# Altium PCB Copy of electronic.PcbDoc
Units mil, origin at the board's own origin, x right, y up, seen from the top; angles counter-clockwise.
Board outline 5082.84 x 2360.45 mil, 2 copper layers (Top Layer, Bottom Layer); 55 components, 37 nets, 160 pads, 42 vias.
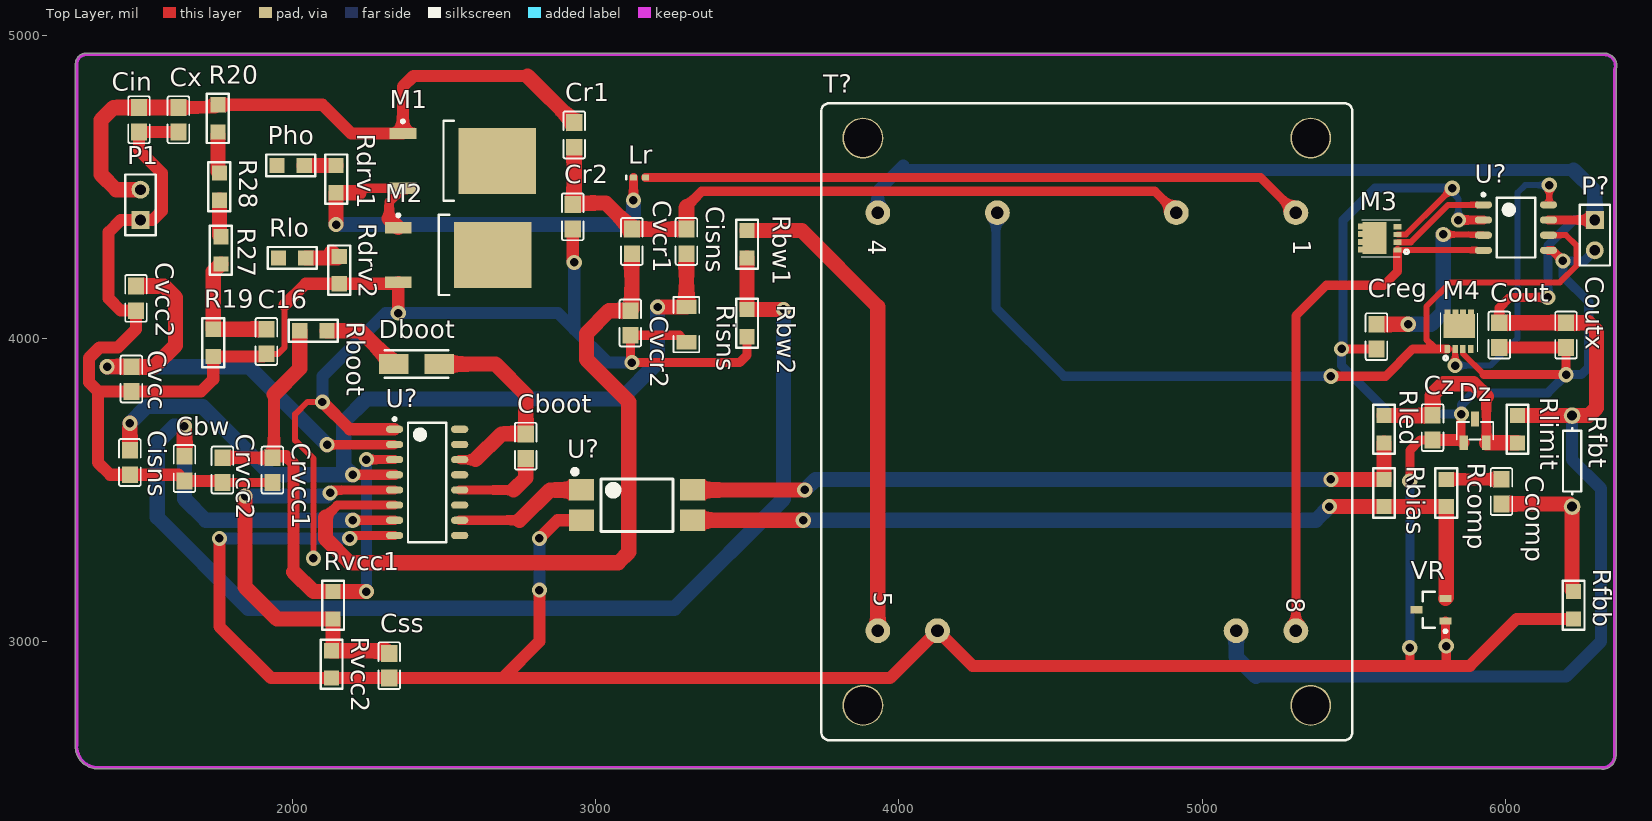
[diagram p0: Top Layer view]
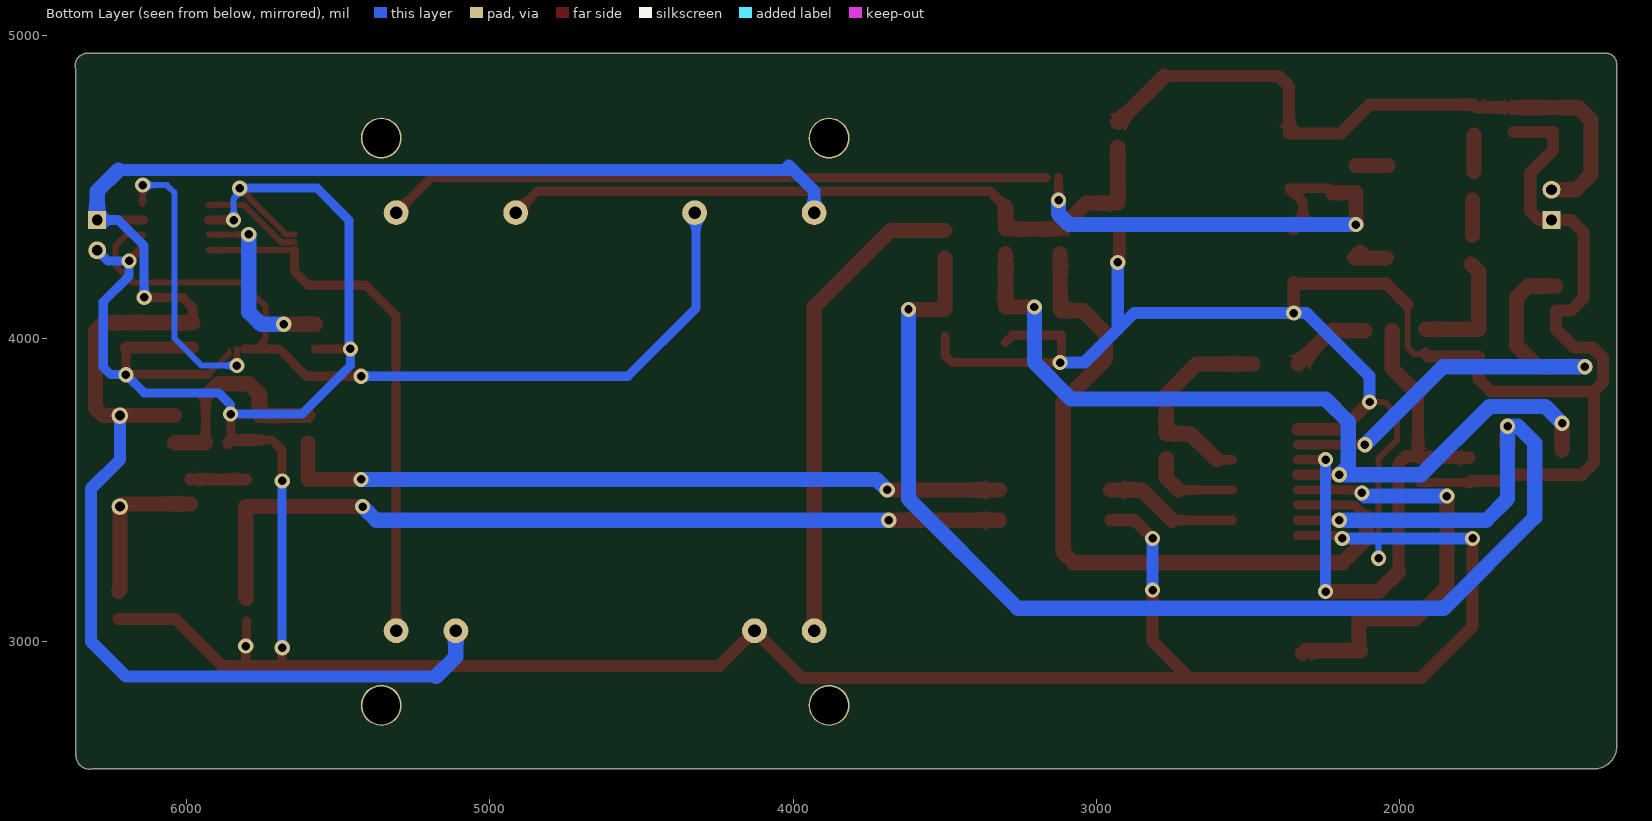
[diagram p1: Bottom Layer view, seen from below]

## Layer stack, top to bottom
Top Solder: solder mask 0.4, Solder Resist, Dk 3.5
Top Layer: signal copper 1.4
Dielectric 1: dielectric 12.6, FR-4, Dk 4.8
Bottom Layer: signal copper 1.4
Bottom Solder: solder mask 0.4, Solder Resist, Dk 3.5

## Board outline
1284.64,2654.08 cw(c1289.66,2654.16) 1284.98,2655.98 1284.98,4905 cw(c1290,4905) 1285.39,4906.97 cw(c1320.74,4904.6) 1319.88,4940.01 cw(c1320,4935) 1320,4940.02 6324.9,4940.02 cw(c6326.46,4899.02) 6328.02,4940.02 6330,4940.02 cw(c6330,4935) 6331.74,4939.7 cw(c6326.46,4899.02) 6367.49,4899.02 cw(c6326.46,4899.02) 6365.02,4884.99 6365.02,2623.66 cw(c6360,2623.66) 6364.53,2621.51 cw(c6320.52,2623.66) 6314.65,2579.99 1362.58,2579.99 cw(c1362.58,2585) 1360.81,2580.31 cw(c1359.56,2655.22)

## Design rules (kind name [scope] priority, off if disabled: settings)
Clearance [All] p1: gap=0 ignorepadtopadclearanceinfootprint=FALSE
HoleSize [All] p1: absolutevalues=TRUE maxlimit=150 minlimit=1 maxpercent=80.000 minpercent=20.000
MinimumSolderMaskSliver [All] p1: minsoldermaskwidth=0
PolygonConnect [All] p1: connectstyle=Relief reliefconductorwidth=10 reliefentries=4 polygonreliefangle="90 Angle" airgapwidth=10
RoutingVias [All] p1: holewidth=28 width=50 viastyle="Through Hole" minholewidth=28 minwidth=50 maxholewidth=28 maxwidth=50
SilkToSilkClearance [All] p1: silktosilkclearance=0
SilkToSolderMaskClearance [IsPad] p1: minsilkscreentomaskgap=0 clearancetoexposedcopper=TRUE
SolderMaskExpansion [All] p1: expansion=4
Width [InNetClass('All Nets')] p1: maxlimit=50 minlimit=10 preferedwidth=20
26 further rules are at their usual default settings.

## Classes and differential pairs
component class electronic: C16 Cboot Cbw Ccomp Cin Cisns Cout Coutx Cr1 Cr2 Creg Crvcc1 Crvcc2 Css Cvcc Cvcc2 Cvcr1 Cvcr2 Cx Cz Dboot Dz Lr M1 M2 M3 M4 P1 P? Pho R19 R20 R27 R28 Rbias Rboot Rbw1 Rcomp Rdrv1 Rdrv2 Rfbb Rfbt Risns Rled Rlimit Rlo Rvcc1 Rvcc2 T? U? VR

## Components (designator, comment, footprint, x,y, rotation, side; value= is the part's Value field where it differs from the comment)
C16 "Cap" C0805 19875,8499.45 r90 top value=220pF
Cboot "Cap" C0805 20730,8154.45 r90 top value=82nF
Cbw "Cap" C0805 19605,8080.55 r90 top value=3.9pF
Ccomp "Cap" C0805 -11972.72,-1015.31 r270 top value=200nF
Cin "Cap" C0805 19455,9230.55 r90 top value=47uF
Cisns "Cap" C0805 21260,8829.45 r90 top value=100pF
Cisns "Cap" C0805 19425,8100.55 r90 top value=3.3pF
Cout "Cap" C0805 -11980,-499.45 r270 top value=120uF
Coutx "Cap" C0805 -11760,-499.45 r270 top value=88uF
Cr1 "Cap" C0805 20890,9180.55 r90 top value=9.128nF
Cr2 "Cap" C0805 20885,8910.55 r90 top value=9.128nF
Creg "Cap" C0805 23535,8515.55 r90 top value=2.2uF
Crvcc1 "Cap" C0805 19895,8075.55 r90 top value=4.7uF
Crvcc2 "Cap" C0805 19730,8075.55 r90 top value=4.7uF
Css "Cap" C0805 -15640,-1589.45 r270 top value=47nF
Cvcc "Cap" C0805 19430,8375.55 r90 top value=2.2uF
Cvcc2 "Cap" C0805 19445,8641.65 r90 top value=15uF
Cvcr1 "Cap" C0805 21080,8829.45 r90 top value=123.494pF
Cvcr2 "Cap" C0805 21075,8560.55 r90 top value=820pF
Cx "Cap" C0805 19585,9230.55 r90 top value=1.5uF
Cz "Cap" C0805 23720,8215.55 r90 top value=100nF
Dboot "1.1V" "ST1300A - duplicate" 2410,3915 r0 top
Dz "D Zener" BZX84C11LT1G 5905,3690 r270 top
Lr "Inductor" 0402-A 3145,4530 r0 top value=138.753uH
M1 "MOSFET-N" FQDN30TM 2561.85,4584.84 r0 top
M2 "MOSFET-N" FQDN30TM 2546.85,4274.84 r0 top
M3 "100v" CSD19538Q3A 5575,4330 r90 top
M4 "100V" CSD19538Q3A 5847.69,4033.99 r0 top
P1 "Header 2" HDR1X2 1500,4390 r90 top
P? "Header 2" HDR1X2 6295,4390 r270 top
Pho "Res1" "R 0805_M" 2025,4575 r0 top value=1
R19 "Res1" "R 0805_M" 1735,4015 r90 top value=226k
R20 "Res1" "R 0805_M" 1750,4755 r90 top value=4.99M
R27 "4.99M" "R 0805_M" 1760,4320 r90 top value=1K
R28 "4.99M" "R 0805_M" 1755,4530 r90 top value=1K
Rbias "Res3" "R 0805_M" 5595,3520 r90 top value=6.04k
Rboot "Res1" "R 0805_M" 2100,4030 r0 top value=1K
Rbw1 "Res1" "R 0805_M" 3495,4340 r90 top value=35.7k
Rbw2 "Res1" "R 0805_M" 3495,4080 r90 top value=10k
Rcomp "Res1" "R 0805_M" 5800,3520 r90 top value=68.1k
Rdrv1 "Res1" "R 0805_M" 2140,4555 r90 top value=5.1k
Rdrv2 "Res1" "R 0805_M" 2150,4255 r90 top value=5.11k
Rfbb "Res1" "R 0805_M" 6220,3150 r90 top value=8.06k
Rfbt "Res1" AXIAL-0.3 6220,3595 r90 top value=86.6k
Risns "Res1" "R 1206" 3295,4050 r90 top value=1K
Rled "Res3" "R 0805_M" 5595,3730 r90 top value=36.5k
Rlimit "Res1" "R 0805_M" 6035,3730 r90 top value=10k
Rlo "Res1" "R 0805_M" 2030,4270 r0 top value=1
Rvcc1 "Res1" "R 0805_M" 2130,3150 r90 top value=150k
Rvcc2 "Res1" "R 0805_M" 2125,2955 r90 top value=49.9k
T? "Trans4 Ideal" TRF_8 4620,3725 r270 top
U? "UCC256303DDB" UCC256303 2445,3525 r0 top
U? "PS2501L-1-F3-A" PS2501-S 3141.93,3450 r0 top
U? "UCC24624" UCC24624 6035,4365 r0 top
VR "D Zener" TLV431x 5755,3105 r180 top

## Footprints (in the part's own frame and the unit in brackets; to place one, negate y for a bottom-side part, rotate by r counter-clockwise, add the part's x,y. Pads: shape width x height; smd on the part's side, far side on the other; paste and mask are expansions set on the pad)
0402-A [mm] "Chip Inductor, Body 1.0x0.5mm, IPC High Density"
  rect 0.6x0.5 smd: 1(-0.5,0) 2(0.5,0)
  silkscreen extent -1.1,-0.15 -1.1,0.15, body extent -0.55,-0.3 0.55,0.3, height 0.55
AXIAL-0.3 [mm] "Axial Device, Thru-Hole; 2 Leads; 0.3 in Pin Spacing"
  round 1.4 hole 0.85: 1(-3.81,0) 2(3.81,0)
  silkscreen extent -2.77,-0.76 2.77,0.76
BZX84C11LT1G [mm]
  rect 1.25x0.7 smd: 1(0.873,-1.077) 2(0.873,0.823) 3(-1.127,-0.127)
  silkscreen extent -0.85,-1.65 0.6,1.4
C0805 [mm]
  rect 1.41x1.35 smd: 1(-115.584,456.184) 2(-113.524,456.184)
  silkscreen extent -116.52,455.28 -112.59,457.09
CSD19538Q3A [mm]
  rect 0.45x0.68 smd: 1(-0.988,-1.752) 2(-0.337,-1.752) 3(0.313,-1.752) 4(0.963,-1.752)
  rect 0.5x0.6 smd: 5(0.988,1.245) 6(0.338,1.245) 7(-0.312,1.245) 8(-0.962,1.245)
  rect 2.65x2 smd: 9(0.013,0.153)
  silkscreen extent -1.55,-2.68 1.55,1.27
FQDN30TM [mm] "D-PAK, 3-Pads, Body 6.21x6.73mm (max), IPC Medium Density"
  rect 2.25x0.95 smd: 1(-5,2.29) 3(-5,-2.29)
  rect 6.5x5.55 smd: 4(2.9,0)
  silkscreen extent -5.12,-3.35 -0.75,3.44, body extent -1.6,-3.37 4.62,3.37, height 2.39
HDR1X2 [mm] "Connector; Header; 2 Position"
  rect 1.5x1.5 hole 0.9: 1(0,0)
  round 1.5 hole 0.9: 2(2.54,0)
  silkscreen extent -1.27,-1.27 3.81,1.27
PS2501-S [mm]
  rect 2.1x1.8 smd: 1(-4.777,1.27) 2(-4.777,-1.27) 3(4.523,-1.27) 4(4.523,1.27)
  silkscreen extent -5.53,-2.2 2.87,3
"R 0805_M" [mil]
  rect 50x50 smd: 1(-75,-5) 2(15,-5)
  silkscreen extent -111,-41 51,31, body extent -69,-30 9,20, height 20
"R 1206" [mil]
  rect 47.54x66.97 smd: 1(-63.22,-5) 2(53.22,-5)
  silkscreen extent -96,-47 86,37
"ST1300A - duplicate" [mm] "Molded Capacitor, 2-Leads, Body 5.00x2.15mm, IPC Medium Density"
  rect 2.45x1.65 smd: 1(-1.9,0) 2(1.9,0)
  silkscreen extent -2.65,-1.15 2.65,1.15, body extent -2.62,-1.15 2.63,1.15, height 2.3
TLV431x [mm] "SOT23, 3-Leads, Body 2.92x2.37mm, Pitch 0.95mm, IPC Medium Density"
  rect 1x0.6 smd: 1(-1.2,0.95) 2(-1.2,-0.95) 3(1.2,0)
  silkscreen extent -1.33,-1.5 0.7,1.92, body extent -0.7,-1.52 0.7,1.52, height 1.12
TRF_8 [mil] "Transformer; 8 Leads"
  round 82 hole 42: 1(-689.17,689.17) 2(-689.17,295) 3(-689.17,-295) 4(-689.17,-689.17) 5(689.17,-689.17) 6(689.17,-492.5) 7(689.17,492.5) 8(689.17,689.17)
  round 135 hole 125: MH1(-935,738.33) MH2(-935,-738.33) MH3(935,-738.33) MH4(935,738.33)
  silkscreen extent -1050,-875 1050,875
UCC24624 [mm] "SOIC, 8-Leads, Body 4.90x3.90mm, Pitch 1.27mm, IPC Medium Density"
  oval 1.45x0.6 smd: 1(-2.725,1.905) 2(-2.725,0.635) 3(-2.725,-0.635) 4(-2.725,-1.905) 5(2.725,-1.905) 6(2.725,-0.635) 7(2.725,0.635) 8(2.725,1.905)
  silkscreen extent -2.85,-2.5 1.6,2.88, body extent -2,-2.5 2,2.5, height 1.75
UCC256303 [mm] "SOIC, 16-Leads, Body 9.90x3.90mm, Pitch 1.27mm, IPC Medium Density"
  oval 1.45x0.6 smd: 1(-2.725,4.445) 2(-2.725,3.175) 3(-2.725,1.905) 4(-2.725,0.635) 5(-2.725,-0.635) 6(-2.725,-1.905) 7(-2.725,-3.175) 8(-2.725,-4.445) 9(2.725,-4.445) 10(2.725,-3.175) 11(2.725,-1.905) 12(2.725,-0.635) 13(2.725,0.635) 14(2.725,1.905) 15(2.725,3.175) 16(2.725,4.445)
  silkscreen extent -2.85,-5 1.6,5.42, body extent -2,-5 2,5, height 1.75

## Part data
C16 Cboot Cbw Ccomp Cin Cisns Cisns Cout Coutx Cr1 Cr2 Creg Crvcc1 Crvcc2 Css Cvcc Cvcc2 Cvcr1 Cvcr2 Cx Cz: "Capacitor", LatestRevisionDate=17-Jul-2002, LatestRevisionNote="Re-released for DXP Platform.", PackageDescription="Radial Cap, Thru-Hole; 2 Leads; 0.3 in Pin Spacing", PackageReference=RAD-0.3, Published=8-Jun-2000, Publisher="Altium Limited"
Dboot: library part "D Zener", "Zener Diode", LatestRevisionDate=17-Jul-2002, LatestRevisionNote="Re-released for DXP Platform.", PackageDescription="Diode, Thru-Hole; 2 Leads; 0.7 in Pin Spacing", PackageReference=DIODE-0.7, Published=8-Jun-2000, Publisher="Altium Limited"
Dz VR: "Zener Diode", LatestRevisionDate=17-Jul-2002, LatestRevisionNote="Re-released for DXP Platform.", PackageDescription="Diode, Thru-Hole; 2 Leads; 0.7 in Pin Spacing", PackageReference=DIODE-0.7, Published=8-Jun-2000, Publisher="Altium Limited"
M1 M2: "N-Channel MOSFET", LatestRevisionDate=17-Jul-2002, LatestRevisionNote="Re-released for DXP Platform.", PackageDescription="TO, Flat Index; 3 In-Line, Axial Leads; Body Dia. 4.6mm; Lead Dia. 0.5 mm (max)", PackageReference=E3, PackageVersion=1995/1996, Published=8-Jun-2000, Publisher="Altium Limited"
M3 M4: library part MOSFET-N, "N-Channel MOSFET", LatestRevisionDate=17-Jul-2002, LatestRevisionNote="Re-released for DXP Platform.", PackageDescription="TO, Flat Index; 3 In-Line, Axial Leads; Body Dia. 4.6mm; Lead Dia. 0.5 mm (max)", PackageReference=E3, PackageVersion=1995/1996, Published=8-Jun-2000, Publisher="Altium Limited"
P1 P?: "Header, 2-Pin", LatestRevisionDate=17-Jul-2002, LatestRevisionNote="Re-released for DXP Platform.", Publisher="Altium Limited"
Pho R19 R20 Rbias Rboot Rbw1 Rbw2 Rcomp Rdrv1 Rdrv2 Rfbb Rfbt Risns Rled Rlimit Rlo Rvcc1 Rvcc2: "Resistor", Published=8-Jun-2000, Publisher="Altium Limited"
  Pho R19 R20 Rboot Rbw1 Rbw2 Rcomp Rdrv1 Rdrv2 Rfbb Rfbt Risns Rlimit Rlo Rvcc1 Rvcc2: LatestRevisionDate=17-Jul-2002, LatestRevisionNote="Re-released for DXP Platform.", PackageDescription="Axial Device, Thru-Hole; 2 Leads; 0.3 in Pin Spacing", PackageReference=AXIAL-0.3
  Rbias Rled: LatestRevisionDate=29-May-2009, LatestRevisionNote="IPC-7351 Footprint Added.", PackageDescription="Chip Resistor", PackageReference=J1-0603
R27 R28: library part Res1, "Resistor", LatestRevisionDate=17-Jul-2002, LatestRevisionNote="Re-released for DXP Platform.", PackageDescription="Axial Device, Thru-Hole; 2 Leads; 0.3 in Pin Spacing", PackageReference=AXIAL-0.3, Published=8-Jun-2000, Publisher="Altium Limited"
T?: "Four-winding Transformer (Ideal)", LatestRevisionDate=17-Jul-2002, LatestRevisionNote="Re-released for DXP Platform.", PackageDescription="Transformer; 8 Leads", PackageReference=TRF_8, Published=25-Jan-2001, Publisher="Altium Limited"
U?: BOM_JLCPCB Part Class="Extended Part", BOM_Manufacturer=RENESAS, BOM_Manufacturer Part=PS2501L-1-F3-A, BOM_Supplier=LCSC, BOM_Supplier Part=C51825, spicePre=U, spiceSymbolName=PS2501L-1-F3-A
Lr: Code_IEC=1005, Code_JEITA=0402, LatestRevisionDate=29-May-2009, LatestRevisionNote="IPC-7351 Footprint Added.", PackageDescription="Chip Inductor", PackageReference=0402-A, Published=8-Jun-2000, Publisher="Altium Limited"

## Via types
v1: diameter 50, hole 28, Top Layer to Bottom Layer, 42 vias

## Nets (pads, with @x,y where several pads share a name; then routed paths per layer and width w, separated by ;. In a path a pad name is that pad's centre, name@x,y a point inside that pad or via, vN(x,y) a via of type N, cw(c..) or ccw(c..) an arc to the next point about the centre after c; other vN are vias at no path point)
_BLK_1: C16.2 R19.2 R27.1 | length 400.4
  Top Layer w50: R27.1 1740,4220 R19.2 C16.2
_BLK_2: U?.9
_HO_1: Pho.1
_HO_2: U?.13
_HS_1: Lr.1 M1.3 M2.1 Rdrv1.1 | length 1586
  Top Layer w30: 2234.68,4494.69 M1.3 2319.84,4449.53 2319.84,4395.16 ; v1(3125.32,4455) Lr.1
  Top Layer w50: v1(2145,4375) Rdrv1.1 2220,4480 ; 2319.84,4395.16 M2.1
  Bottom Layer w50: v1(2145,4375) 3090.32,4375 3125.32,4410 v1(3125.32,4455)
_HS_2: Cboot.1 U?.12 | length 298.2
  Top Layer w30: U?.12 2730,3500
  Top Layer w50: 2730,3500 2770,3540 Cboot.1
_LO_1: Rlo.1
_LO_2: U?.11
GND: C16.1 Cbw.1 Cin.1 Cisns.1@1465,3550 Cout.2 Coutx.2 Cr2.1 Creg.1 Crvcc1.1 Crvcc2.1 Css.2 Cvcc2.1 Cvcc.1 Cvcr2.1 Cx.1 Cz.1 Dz.1 M2.3 M3.3 M4.3 P1.1 P?.2 R19.1 Rbw2.1 Rdrv2.1 Rfbb.1 Risns.1 Rvcc2.1 T?.6 U?.1@2337.72,3700 U?.2@2953.86,3400 U?.2@5927.72,4390 U?.5@6142.28,4290 U?.8@2337.72,3350 VR.1 | length 17876.3
  Top Layer w10: v1@2925,4255 v1(2930,4250) ; v1@3115,3925 v1(3120,3920) ; v1@5802.24,2987.76 v1(5805,2985) ; 5860,3950 M4.3
  Top Layer w20: C16.1 1953.9,3948.9 1975,3970 1975,4110 ; v1(2070,3275) 2070,3603.9 2010,3663.9 2010,3750 2050,3790 v1(2100,3790) ; M3.3 5672.31,4342.31 5790,4460 v1(5825,4495) ; 5860,3950 5930,3880
  Top Layer w30: Crvcc2.1 Crvcc1.1 ; v1(2190,3340) 2200,3350 U?.8@2337.72,3350 ; v1@3115,3925 Cvcr2.1 3276.78,4010 Risns.1 ; v1(3120,3920) 3475,3920 3500,3945 Rbw2.1 ; v1(5460,3965) Creg.1 ; 5685,2925 v1(5685,2980) ; v1(5685,3530) 5685,3630 5720,3665 Cz.1 ; v1@5802.24,2987.76 VR.1 ; 5805,2925 v1(5805,2985) ; v1(5845,4390) U?.2@5927.72,4390 ; Dz.1@5853.23,3665 v1@5853.23,3748.23 ; 5930,3880 v1(6200,3880) Coutx.2 ; U?.5@6142.28,4290 6155,4290 v1(6190,4255)
  Top Layer w40: Cx.1 Cin.1 1495,4620 1570,4545 1570,4420 1540,4390 P1.1 1435,4390 1395,4350 1395,4131.1 1435,4091.1 Cvcc2.1 1485,4030 1425,3970 1365,3970 1330,3935 1330,3855 1360,3825 ; v1(1760,3340) 1760,3050 1930,2880 Rvcc2.1 Css.2 2695,2880 2815,3000 v1(2815,3170) ; Crvcc2.1 1765,3530 Cbw.1 1625,3550 1465,3550 1400,3550 1360,3590 1360,3825 ; C16.1 1906.1,3940 R19.1 1740,3865 1700,3825 Cvcc.1 1360,3825 ; 1975,4110 2045,4180 Rdrv2.1 2345.32,4180 M2.3 v1(2350,4082.99) ; v1(2100,3790) 2190,3700 U?.1@2337.72,3700 ; 2675,2880 3971.67,2880 T?.6 4243.33,2920 5882.72,2920 6037.72,3075 Rfbb.1 ; v1(2815,3340) 2875,3400 U?.2@2953.86,3400 ; v1@2925,4255 Cr2.1 ; Cz.1 5853.23,3665 Dz.1 ; Cout.2 Coutx.2
  Bottom Layer w10: v1(5460,3965) v1@5465,3970
  Bottom Layer w20: v1(2070,3275) 2070,3340 ; v1(5825,4495) 5825,4480 5845,4460 v1(5845,4390)
  Bottom Layer w30: v1(5460,3965) 5460,3910 5620,3750 v1(5855,3750) 5855,3780 5895,3820 6140,3820 v1(6200,3880) 6250,3880 6275,3905 6275,4120 6190,4205 v1(6190,4255) 6260,4255 P?.2 ; v1@5465,3970 5465,4390 5570,4495 v1(5825,4495) ; v1(5685,2980) v1(5685,3530)
  Bottom Layer w40: v1(1760,3340) v1(2190,3340) ; v1(2100,3790) 2100,3875 2307.99,4082.99 v1(2350,4082.99) 2877.01,4082.99 2930,4030 ; v1(2815,3170) v1(2815,3340) ; v1(2930,4250) 2930,4030 ; v1(3120,3920) 3040,3920 2930,4030
NetCboot_2: Cboot.2 Dboot.2 U?.14 | length 709.5
  Top Layer w30: U?.14 2605,3600
  Top Layer w50: Dboot.2 2670,3915 2770,3815 Cboot.2 2690,3685 2605,3600
NetCbw_2: Cbw.2 Rbw1.1 Rbw2.2 U?.7@2337.72,3400 | length 4671.8
  Top Layer w30: v1(2200,3400) U?.7@2337.72,3400
  Top Layer w50: Cbw.2 v1(1645,3710) ; Rbw1.1 Rbw2.2 v1(3620,4095)
  Bottom Layer w50: v1(2200,3400) 1715,3400 1645,3470 v1(1645,3710) 1610,3710 1555,3655 1555,3410 1855,3110 3260,3110 3620,3470 v1(3620,4095)
NetCcomp_1: Ccomp.1 Rcomp.2 | length 182.4
  Top Layer w40: Rcomp.2 5987.04,3535 Ccomp.1
NetCcomp_2: Ccomp.2 Rfbb.2 Rfbt.1 | length 518.6
  Top Layer w50: Ccomp.2 6210.86,3454.14 Rfbt.1 6220,3170 Rfbb.2
NetCisns_1: Cisns.1@3300,4278.9 Cisns.2@1465,3631.1 Risns.2 U?.4@2337.72,3550 | length 2834.7
  Top Layer w35: v1(2200,3550) U?.4@2337.72,3550
  Top Layer w50: Cisns.2@1465,3631.1 v1(1465,3720) ; v1(3205,4103.22) Risns.2 Cisns.1@3300,4278.9
  Bottom Layer w50: v1(1465,3720) 1520,3775 1705,3775 1930,3550 v1(2200,3550) 2170,3580 2170,3725 2245,3800 3085,3800 3205,3920 v1(3205,4103.22)
NetCisns_2: Cisns.2@3300,4360 Cr1.1 Cr2.2 Cvcr1.2 T?.2 | length 2329.6
  Top Layer w30: 3300,4435 3350,4485 4844.17,4485 T?.2
  Top Layer w50: Cr1.1 2930,4446.1 3033.9,4446.1 Cvcr1.2 3300,4360 3300,4435
NetCreg_2: Creg.2 U?.3@5927.72,4340 | length 623.2
  Top Layer w20: v1(5795,4342.31) U?.3@5925.4,4342.31
  Top Layer w50: Creg.2 v1(5680,4046.1)
  Bottom Layer w50: v1(5680,4046.1) 5755,4046.1 5795,4086.1 v1(5795,4342.31)
NetCrvcc1_2: Crvcc1.2 Crvcc2.2 Rboot.1 Rvcc1.2 U?.3@2337.72,3600 | length 1853.4
  Top Layer w10: Crvcc1.2@1940,3605 Crvcc1.2@1940,3611.1
  Top Layer w30: v1(2245,3600) U?.3@2337.72,3600
  Top Layer w40: Crvcc2.2 Crvcc1.2 Crvcc1.2@1940,3611.1 ; 1940,3815 Crvcc1.2@1940,3611.1 ; 2005,3230 2005,3586.1 1980,3611.1 Crvcc1.2@1940,3611.1
  Top Layer w50: 1940,3815 2025,3900 Rboot.1 ; 2005,3230 2070,3165 Rvcc1.2 v1(2245,3165)
  Bottom Layer w35: v1(2245,3165) v1(2245,3600)
NetCss_1: Css.1 Rvcc1.1 Rvcc2.2 U?.5@2337.72,3500 | length 1435.2
  Top Layer w30: v1(2125,3490) 2135,3500 U?.5@2337.72,3500
  Top Layer w50: v1(1845,3480) 1845,3180 1950,3075 Rvcc1.1 2135,2975 Rvcc2.2 2311.1,2970 Css.1
  Bottom Layer w50: v1(1845,3480) 2115,3480 v1(2125,3490)
NetCvcr1_1: Cvcr1.1 Cvcr2.2 U?.6@2337.72,3450 | length 2499.9
  Top Layer w30: 2110,3410 2150,3450 U?.6@2337.72,3450
  Top Layer w50: 2110,3410 2110,3340 2190,3260 3075,3260 3110,3295 3110,3790 2970,3930 2970,4016.1 3045,4091.1 Cvcr2.2 ; Cvcr2.2@3120,4096.1 Cvcr1.1
NetCz_2: Cz.2 Dz.2 Rled.2 Rlimit.1 | length 693.6
  Top Layer w10: Rlimit.1@6039.37,3655.63 Rlimit.1
  Top Layer w30: Dz.2 5937.4,3807.6
  Top Layer w50: Rled.2 5758.9,3745 Cz.2 5760,3815 5795,3850 5895,3850 5937.4,3807.6 ; Dz.2 Rlimit.1@6039.37,3655.63
NetDboot_1: Dboot.1 Rboot.2 | length 265.8
  Top Layer w50: Rboot.2 2225.2,4025 Dboot.1
NetLr_2: Lr.2 T?.1 | length 2192.5
  Top Layer w30: Lr.2 5193.33,4530 T?.1
NetM1_2: Pho.2 Rdrv1.2 | length 105
  Top Layer w50: Pho.2 Rdrv1.2
NetM2_2: Rdrv2.2 Rlo.2 | length 133.3
  Top Layer w50: Rlo.2 2150,4265 Rdrv2.2@2130,4285
NetM3_1: M3.1 T?.8 U?.4@5927.72,4290 | length 1788.3
  Top Layer w20: M3.1 5926.6,4291.12 U?.4@5927.72,4290
  Top Layer w30: T?.8 5309.17,4074.17 5410,4175 5598.99,4175 5645,4221.01 M3.1@5645,4290.11
NetM3_2: M3.2 U?.1@5927.72,4440 | length 334.8
  Top Layer w20: M3.2 5688.28,4316.72 5811.56,4440 U?.1@5927.72,4440
NetM4_1: M4.1 T?.3 U?.6@6142.28,4340 | length 2838.7
  Top Layer w20: M4.1 5770,3965 5740,3995 5740,4105 5819.69,4184.69 6179.69,4184.69 6235,4240 6235,4305 6200,4340 U?.6@6142.28,4340
  Top Layer w30: v1(5425,3875) 5605,3875 5695,3965 M4.1
  Bottom Layer w30: T?.3@4320,4405 4320,4100 4545,3875 v1(5425,3875)
NetM4_2: M4.2 U?.8@6142.28,4440 | length 955.5
  Top Layer w20: v1(5834.41,3910) M4.2 ; U?.8@6145,4442.72 v1(6145,4505)
  Bottom Layer w20: v1(5834.41,3910) 5950,3910 6040,4000 6040,4480 6065,4505 v1(6145,4505)
NetR20_1: R20.1 R28.2 | length 120
  Top Layer w50: R28.2@1755,4550 R20.1@1755,4670
NetR27_2: R27.2 R28.1 | length 115
  Top Layer w50: R27.2@1760,4340 R28.1
NetRbias_1: Rbias.1 Rcomp.1 U?.3@3320,3400 VR.2 | length 2807.4
  Top Layer w50: U?.3@3320,3400 v1(3685,3400) ; v1(5420,3445) Rbias.1 Rcomp.1 5805,3145.16 VR.2
  Bottom Layer w50: v1(3685,3400) 5375,3400 v1(5420,3445)
NetRbias_2: Rbias.2 Rled.1 U?.4@3320,3500 | length 2414.5
  Top Layer w50: U?.4@3320,3500 v1(3690,3500) ; v1(5425,3535) Rbias.2 Rled.1
  Bottom Layer w50: v1(3690,3500) 3725,3535 v1(5425,3535)
NetRbw1_2: Rbw1.2 T?.5 | length 1603.1
  Top Layer w50: Rbw1.2 3680,4355 3930.83,4104.17 T?.5
NetU?_1: U?.1@2953.86,3500 U?.10 | length 443
  Top Layer w30: U?.10 2750,3400
  Top Layer w50: 2750,3400 2850,3500 U?.1@2953.86,3500
V1: Cvcc2.2 Cvcc.2 U?.2@2337.72,3650 | length 1611.5
  Top Layer w30: v1(2115,3648.9) U?.2@2336.61,3648.9
  Top Layer w50: v1(1390,3906.1) Cvcc.2 1545,3906.1 1615,3976.1 1615,4135 1577.8,4172.2 Cvcc2.2
  Bottom Layer w50: v1(1390,3906.1) 1857.8,3906.1 v1(2115,3648.9)
Vin: Cin.2 Cr1.2 Cx.2 M1.1 P1.2 R20.2 | length 2184
  Top Layer w10: 2100,4770 2110,4760
  Top Layer w40: Cx.2 1746.1,4761.1 R20.2 2100,4770 ; 2110,4760 2195,4675 M1.1 2365,4830 2400,4865 2776.1,4865
  Top Layer w50: P1.2 1420,4490 1370,4540 1370,4720 1411.1,4761.1 Cin.2 Cx.2 ; 2776.1,4865 Cr1.2
Vout: Cout.1 Coutx.1 P?.1 Rfbt.2 Rlimit.2 T?.4 T?.7 U?.7@6142.28,4390 | length 6334.4
  Top Layer w30: Cout.1 5980,4100 6015,4135 v1(6140,4135) ; U?.7@6142.28,4390 P?.1
  Top Layer w50: Cout.1 Coutx.1 6273.9,4051.1 6300,4025 6300,3770 6275,3745 Rfbt.2 Rlimit.2
  Bottom Layer w30: v1(6140,4135) 6140,4305 6225,4390 P?.1
  Bottom Layer w40: T?.4 3930.83,4485.83 4015,4570 ; 4015,4555 6225,4555 ; 5177.5,2885 6200,2885 6315,3000 6315,3505 6220,3600 Rfbt.2
  Bottom Layer w50: T?.7 5112.5,2950 5177.5,2885 ; 6225,4555 6295,4485 P?.1
pads on no net: Dz.3 M1.4 M2.4 M3.4 M3.5 M3.6 M3.7 M3.8 M3.9 M4.4 M4.5 M4.6 M4.7 M4.8 M4.9 T?.MH1 T?.MH2 T?.MH3 T?.MH4 U?.15 U?.16 VR.3

## Polygon pours and split planes (outlines as drawn)
no net on Bottom Layer "Bottom Layer-No Net" (solid, pour order 18): 580,3110
no net on Bottom Layer "Bottom Layer-No Net 1" (solid, pour order 16): 1060,3160
no net on Bottom Layer "Bottom Layer-No Net 2" (solid, pour order 4): 0,3490
no net on Top Layer "Top Layer-No Net" (solid, pour order 8): 5045,5485
no net on Top Layer "Top Layer-No Net 1" (solid, pour order 6): 3885,5080

## Keep-outs
Top Layer:
  lines w10: 1289.66,2654.16 ccw(c1359.56,2655.22) 1364.47,2585.49 ; 1290,2655.22 1290,4905 ; 1290.32,4904.39 cw(c1320.74,4904.6) 1320,4935 1405,4935 6330,4935 ; 1364.99,2585.18 1362.58,2585 6320,2585 ; 6315,2585 ccw(c6320.52,2623.66) 6359.55,2624.98 ; 6325,4935 cw(c6326.46,4899.02) 6359.69,4885.13 ; 6360,2623.66 6360,4885.08

## Text inside footprints (layer, text, board x,y; h text height)
T?: Top Overlay "1" at 5300,4325 h59.06 r270; Top Overlay "5" at 3920,3165 h59.06 r270; Top Overlay "8" at 5280,3145 h59.06 r270; Top Overlay "4" at 3900,4325 h59.06 r270